# Allegro board QUADCOPTER1brd2_2.brd
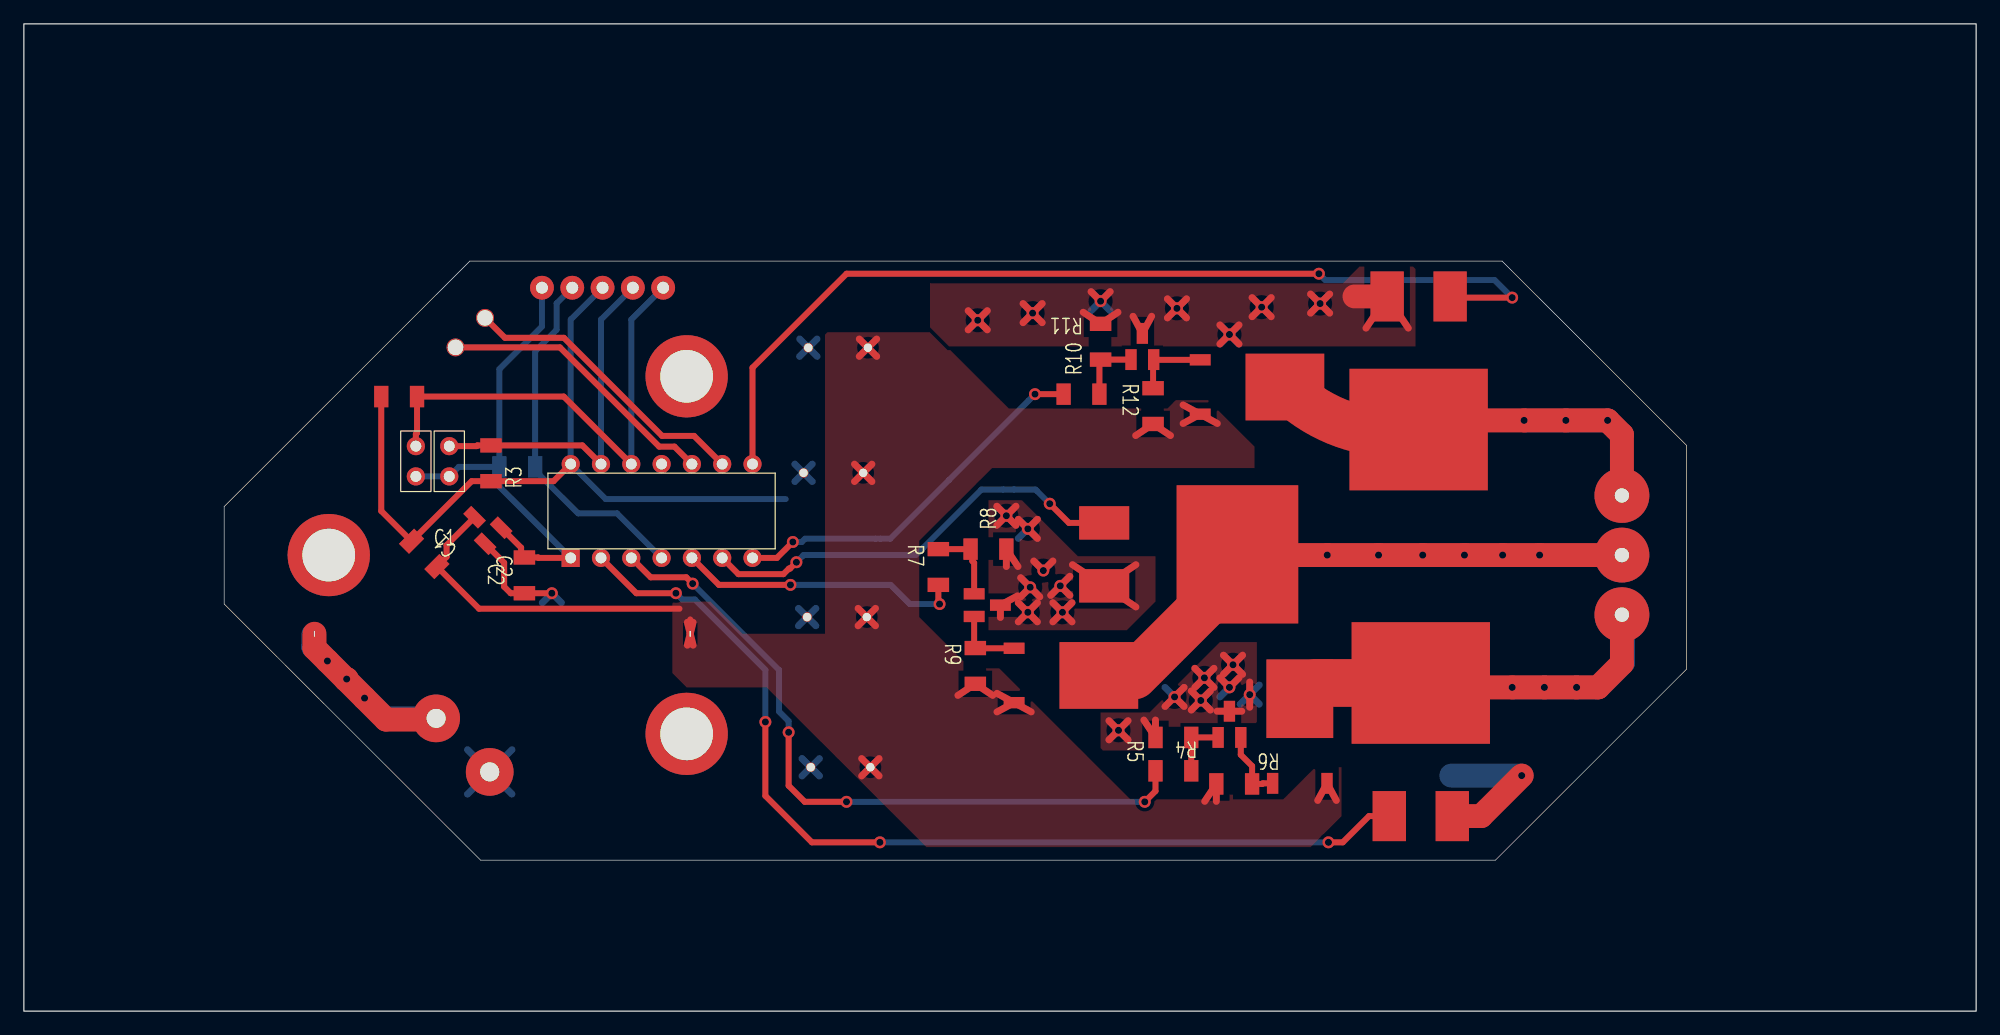
[diagram p0: board, top side]
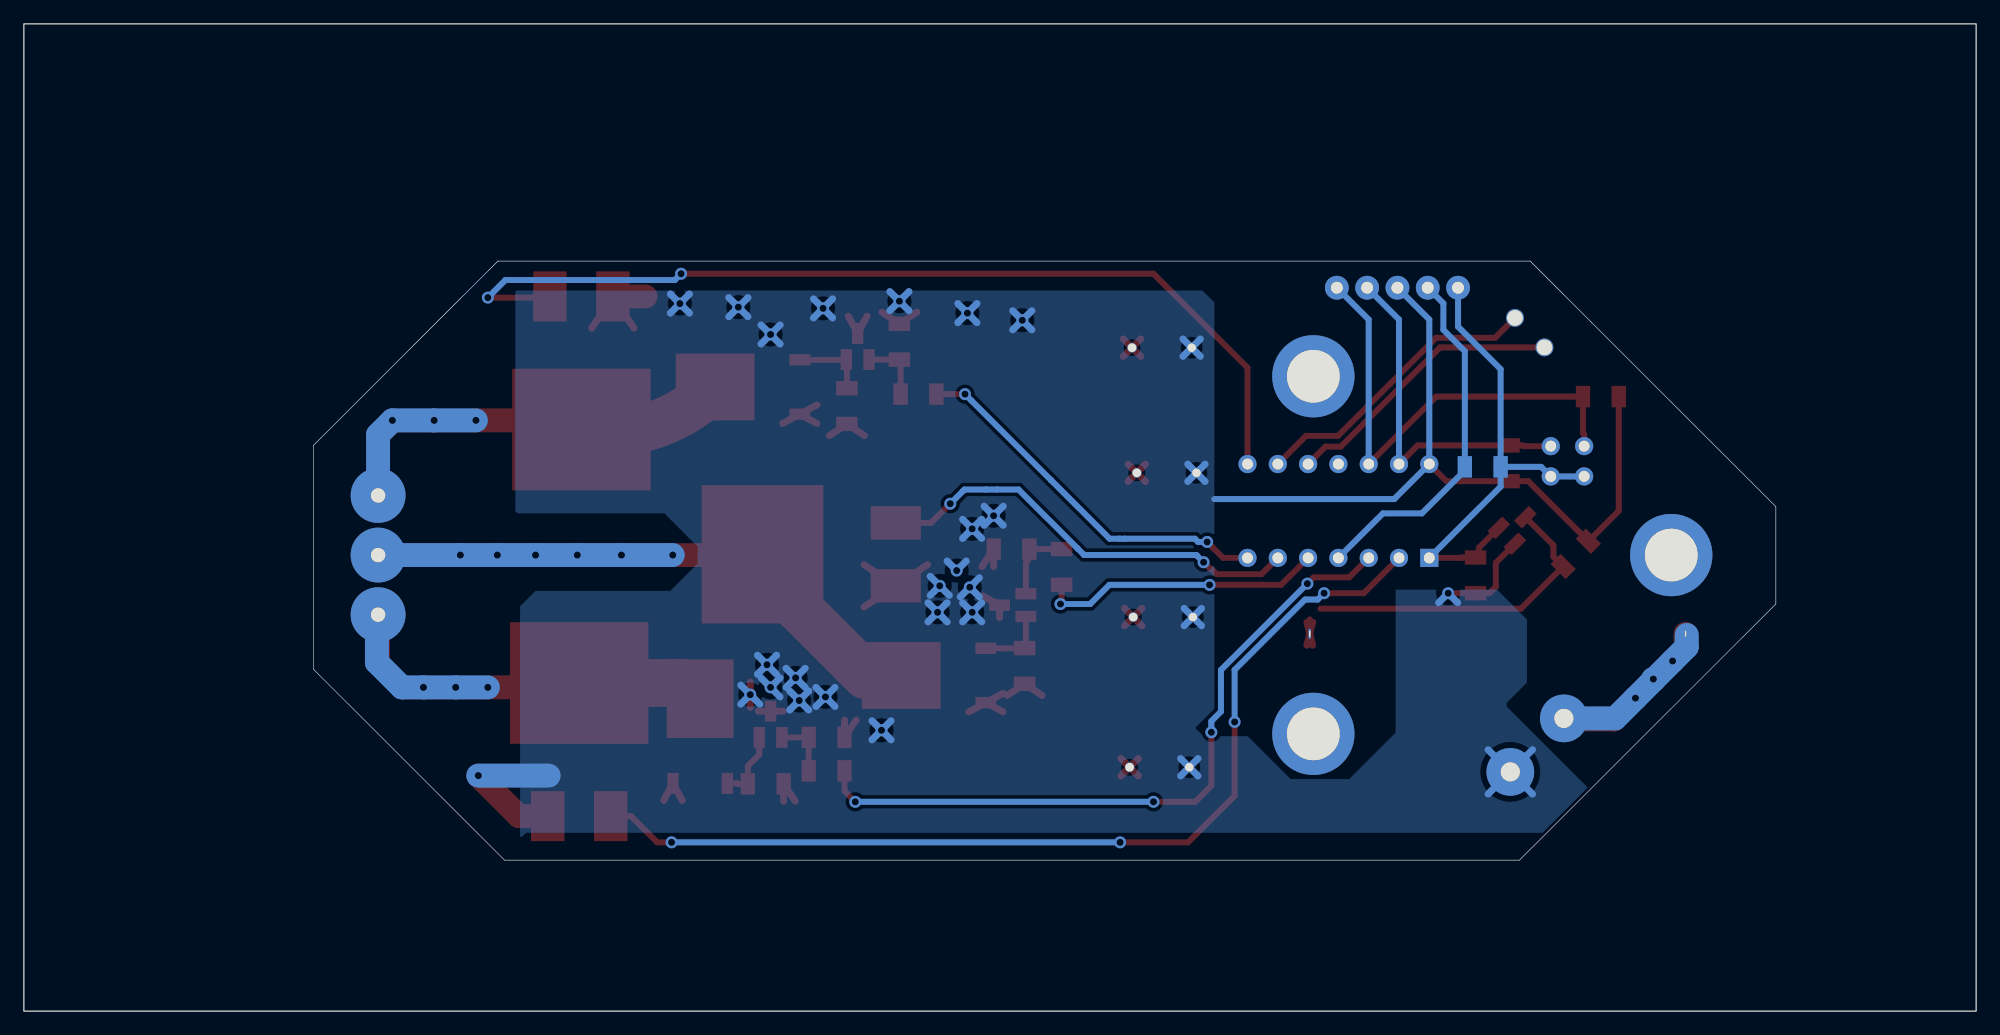
[diagram p1: board, bottom side, seen from below]

Outline 163.65 x 82.83 mm; copper layers: TOP, BOTTOM. Coordinates in mm from the lower left corner of the outline.
Outline path: rectangle 0,0 163.65,82.83 ; 16.79,42.33 16.79,34.16 38.28,12.67 123.36,12.67 139.36,28.68 139.36,47.48 123.92,62.93 37.39,62.93 16.79,42.33

## Placement (name value [footprint] x y rotation side)
C1  1uF  [SMD_CAP_1206]  33.56 38.36 135 top
C2  1uF  [SMD_CAP_1206]  41.96 36.56 270 top
C3  100uF  [CAP250]  73.76 58.66 180 top
C4  100uF  [CAP250]  73.36 48.16 180 top
C5  100uF  [CAP250]  73.66 36.06 180 top
C6  100uF  [CAP250]  73.96 23.46 180 top
F1  FUSE  [FUSECLIP]  4.36 11.66 0 top
FET1  ON NTD5867  [INF-PG-SOT23_L]  101.06 24.06 90 top
FET2  ON NTD5867  [INF-PG-SOT23_L]  80.76 34.06 0 top
FET3  ON NTD5867  [INF-PG-SOT23_L]  93.76 55.76 90 top
FET4  ON NTD20P06L  [INF-PG-TO252-3-1_N]  106.96 23.86 90 top
FET5  ON NTD20P06L  [INF-PG-TO252-3-1_N]  87.76 28.16 0 top
FET6  ON NTD20P06L  [INF-PG-TO252-3-1_N]  103.36 52.36 0 top
FET7  IRF640NS  [D2PAK]  94.46 -3.64 0 top
FET8  IRF640NS  [D2PAK]  70.56 60.96 270 top
FET9  IRF640NS  [D2PAK]  139.56 79.96 180 top
J1  CON2  [KDCONN2]  34.56 24.56 315 top
J2  CON2  [KDCONN2_2]  38.66 58.16 225 top
J3  To Motor  [ED1362]  136.46 30.76 90 top
J4  CON5  [CONN5]  42.16 61.96 270 top
J5  JUMPER  [JUMPER2]  35.66 44.86 90 top
J6  JUMPER  [JUMPER2]  32.86 44.86 90 top
NOREF  -  [unnamed]  55.56 53.26 0 top
NOREF#2  -  [unnamed]  55.56 23.26 0 top
NOREF#3  -  [unnamed]  25.56 38.26 0 top
Q1  Diodes_AP1117T50L-U  [INF-PG-SOT23_L]  38.56 40.66 135 top
R1  10k  [SMD_RES_1206]  41.36 45.66 180 bottom
R2  10k  [SMD_RES_1206]  31.46 51.56 0 top
R3  10k  [SMD_RES_1206]  39.16 45.96 90 top
R4  10k  [SMD_RES_1206]  96.36 20.16 180 top
R5  10k  [SMD_RES_1206]  96.36 22.96 0 top
R6  10k  [SMD_RES_1206]  101.46 19.06 180 top
R7  10k  [SMD_RES_1206]  76.66 37.26 270 top
R8  10k  [SMD_RES_1206]  80.86 38.76 180 top
R9  10k  [SMD_RES_1206]  79.76 28.96 270 top
R10  10k  [SMD_RES_1206]  88.66 51.76 180 top
R11  10k  [SMD_RES_1206]  90.26 56.16 270 top
R12  10k  [SMD_RES_1206]  94.66 50.76 270 top
U1  PIC16F1503  [PIC16FL1503]  53.46 41.96 90 top

## Library data of the parts
C1-C6 = CAP
F1 = FUSE
FET1-FET3 = ON NTD5867
FET4-FET6 = ON NTD20P06L_0
FET7-FET9 = IRF640NS_0
J1 J2 = CON2
J3 = CON3
J4 = CON5
J5 J6 = JUMPER: User Part Number: ***
Q1 = Diodes_AP1117T50L-U_1
R1-R12 = R
U1 = PIC16LF1503_4

## Footprints (pads in the part's own frame, mm; a bottom-side part is the same pattern mirrored in y, then rotated)
CAP250
  round 0.8 hole 0.7: 1(3,3) 2(8,3)
CONN5
  round 2 hole 1: 1(1.27,11.43) 2(1.27,8.89) 3(1.27,6.35) 4(1.27,3.81) 5(1.27,1.27)
D2PAK
  rect 2.8x4.2 smd: 1(20,20) 3(25.28,20)
  rect 11.6x10.2 smd: 2(22.64,31.17)
ED1362
  round 4.6 hole 1.2: 1(2.5,2.5) 2(7.5,2.5) 3(12.5,2.5)
FUSECLIP
  rect 0.2x0.8 hole 0.1x0.5: 1(20,20) 2(51.5,20)
INF-PG-SOT23_L
  rect 1.75x0.95 smd: 1(-1.1,0.95) 2(-1.1,-0.95) 3(1.1,0)
INF-PG-TO252-3-1_N
  rect 1.75x0.95 smd: 1(-4.75,2.28) 3(-4.75,-2.28)
  rect 6.6x5.6 smd: 2(2.35,0)
JUMPER2
  round 1.524 hole 0.914: 1(0,0) 2(2.54,0)
KDCONN2
  round 4 hole 1.6: 1(0,0) 2(6.35,0)
KDCONN2_2
  round 1.5 hole 1.3: 1(0,0) 2(3.5,0)
PIC16FL1503
  rect 1.524x1.524 hole 0.914: 1(-3.937,7.62)
  round 1.524 hole 0.914: 2(-3.937,5.08) 3(-3.937,2.54) 4(-3.937,0) 5(-3.937,-2.54) 6(-3.937,-5.08) 7(-3.937,-7.62) 8(3.937,-7.62) 9(3.937,-5.08) 10(3.937,-2.54) 11(3.937,0) 12(3.937,2.54) 13(3.937,5.08) 14(3.937,7.62)
SMD_CAP_1206
  rect 1.2x1.8 smd: 1(-1.5,0) 2(1.5,0)
SMD_RES_1206
  rect 1.2x1.8 smd: 1(-1.5,0) 2(1.5,0)
unnamed
  round 6.9 hole 4.42: (0,0)

## Nets
12V: C1.1 C3.1 C4.1 C5.1 C6.1 F1.2 FET4.3(S) FET5.3(S) FET6.3(S) Q1.3(VIN) R6.2 R9.2 R12.2
GND: C1.2 C2.2 C3.2 C4.2 C5.2 C6.2 FET1.3(S) FET2.3(S) FET3.3(S) FET7.3(S) FET8.3(S) FET9.3(S) J1.2 J4.3 Q1.1(GND) R2.1 R3.1 R5.1 R8.1 R11.1 U1.14(VSS)
A: FET4.2(D) FET7.2(D) J3.1
ADDR0: J4.2 J5.2 R3.2 U1.13(ICSPDAT/ADDR0)
ADDR1: J4.1 J6.2 R2.2 U1.12(ICSPCLK/ADDR1)
AHIGH: R4.2 U1.3(RA4)
ALOW: FET7.1(G) U1.2(RA5)
B: FET5.2(D) FET8.2(D) J3.2
BHIGH: R7.2 U1.5(RC5)
BLOW: FET8.1(G) U1.6(RC4)
C: FET6.2(D) FET9.2(D) J3.3
CHIGH: R10.2 U1.7(RC3)
CLOW: FET9.1(G) U1.8(RC2)
NMCLR: J4.4 R1.1 U1.4(NMCLR)
SCL: J2.2 U1.10(SCL)
SDA: J2.1 U1.9(SDA)
VEXT: C2.1 J4.5 J5.1 J6.1 Q1.2(VOUT) R1.2 U1.1(VDD)
N76044: F1.1 J1.1
N143086: FET1.1(G) R4.1 R5.2
N143844: FET2.1(G) R7.1 R8.2
N143928: FET2.2(D) FET5.1(G) R9.1
N144222: FET3.2(D) FET6.1(G) R12.1
N144242: FET3.1(G) R10.1 R11.2
N158488: FET1.2(D) FET4.1(G) R6.1

Pads without a net: U1 11

## Via types
v1: diameter 1, hole 0.6, TOP to BOTTOM, 54 vias

## Routing (per net, layer and track width the routed paths; a pad name or vN(x,y) marks a point on that pad's centre or on a via; arc(x,y) is an arc through that point)
12V: length 72.2
  TOP w0.5: 54.96,33.76 38.16,33.76 C1.1 35.43,38.12 35.43,39.09 Q1.3 ; F1.2 55.86,32.86
  TOP w0.581: 110.02,17.68 FET4.3 108.46,17.68 ; FET6.3 100.04,49.31 ; FET6.3 97.18,49.31 ; FET6.3 97.18,50.86 ; C4.1 71.09,44.44 ; C4.1 69.63,44.44 ; C4.1 69.63,45.89 ; C4.1 71.09,45.89 ; C5.1 71.39,32.34 ; C5.1 69.93,32.34 ; C5.1 71.39,33.79 ; C5.1 69.93,33.79 ; 98.99,17.6 R6.2 99.96,17.6 ; 81.22,26.49 R9.2 78.3,26.49 ; 55.62,32.62 F1.2 ; F1.2 55.62,30.7 ; F1.2 56.1,30.7 ; F1.2 56.1,32.62 ; 81.58,25.11 FET5.3 ; FET5.3 84.44,25.11 ; FET5.3 81.58,26.66 ; 70.03,56.39 C3.1 ; C3.1 70.03,54.94 ; C3.1 71.49,56.39 ; C3.1 71.49,54.94 ; C6.1 71.69,19.74 ; C6.1 71.69,21.19 ; C6.1 70.23,21.19 ; C6.1 70.23,19.74 ; 96.12,48.29 R12.2 93.2,48.29
GND: length 321.4
  TOP w0.5: Q1.1 40.26,37.62 40.26,35.61 40.81,35.06 C2.2 v1(44.26,35.06) ; U1.14 44.4,44.46 R3.1 37.54,44.46 C1.2 29.96,41.96 R2.1
  TOP w0.581: 84.66,37.76 v1(85.46,36.96) 86.26,37.76 ; v1(82.36,41.56) 83.16,40.76 ; v1(82.36,41.56) 81.56,42.36 ; v1(82.36,41.56) 81.56,40.76 ; v1(82.36,41.56) 83.16,42.36 ; v1(84.56,58.56) 85.36,57.76 ; v1(84.56,58.56) 83.76,59.36 ; v1(84.56,58.56) 83.76,57.76 ; v1(84.56,58.56) 85.36,59.36 ; v1(91.76,23.56) 92.56,22.76 ; v1(91.76,23.56) 90.96,22.76 ; v1(91.76,23.56) 92.56,24.36 ; v1(91.76,23.56) 90.96,24.36 ; 83.36,34.26 v1(84.16,33.46) ; v1(84.16,33.46) 83.36,32.66 ; v1(84.16,33.46) 84.96,32.66 ; v1(84.16,33.46) 84.96,34.26 ; v1(98.96,27.96) 99.76,28.76 ; v1(98.96,27.96) 98.16,27.16 ; v1(98.96,27.96) 99.76,27.16 ; v1(98.96,27.96) 98.16,28.76 ; 102.76,27.62 v1(102.76,26.56) 102.76,25.5 ; 82.36,37.3 R8.1 83.33,37.3 ; v1(79.96,57.96) 80.76,57.16 ; v1(79.96,57.96) 79.16,57.16 ; v1(79.96,57.96) 79.16,58.76 ; v1(79.96,57.96) 80.76,58.76 ; v1(98.66,26.06) 99.46,25.26 ; v1(98.66,26.06) 97.86,26.86 ; v1(98.66,26.06) 99.46,26.86 ; v1(98.66,26.06) 97.86,25.26 ; 102.96,59.86 v1(103.76,59.06) ; v1(103.76,59.06) 102.96,58.26 ; v1(103.76,59.06) 104.56,58.26 ; v1(103.76,59.06) 104.56,59.86 ; 92.98,58.3 FET3.3 94.54,58.3 ; v1(101.36,29.06) 102.16,28.26 ; v1(101.36,29.06) 100.56,28.26 ; v1(101.36,29.06) 100.56,29.86 ; v1(101.36,29.06) 102.16,29.86 ; 100.26,55.97 v1(101.06,56.77) ; v1(101.06,56.77) 101.86,57.57 ; v1(101.06,56.77) 101.86,55.97 ; v1(101.06,56.77) 100.26,57.57 ; v1(108.66,59.36) 109.46,60.16 ; v1(108.66,59.36) 109.46,58.56 ; v1(108.66,59.36) 107.86,60.16 ; v1(108.66,59.36) 107.86,58.56 ; FET8.3 93.22,33.91 ; FET8.3 87.9,37.46 ; FET8.3 93.22,37.46 ; 94.86,24.42 R5.1 93.89,24.42 ; v1(96.46,26.36) 97.26,25.56 ; v1(96.46,26.36) 95.66,25.56 ; v1(96.46,26.36) 97.26,27.16 ; 89.46,60.36 v1(90.26,59.56) 91.06,60.36 ; 83.56,34.76 v1(84.36,35.56) ; v1(84.36,35.56) 83.56,36.36 ; v1(84.36,35.56) 85.16,34.76 ; v1(84.16,40.46) 84.96,39.66 ; v1(84.16,40.46) 83.36,41.26 ; v1(84.16,40.46) 84.96,41.26 ; 86.26,32.66 v1(87.06,33.46) ; v1(87.06,33.46) 86.26,34.26 ; v1(87.06,33.46) 87.86,32.66 ; v1(87.06,33.46) 87.86,34.26 ; v1(96.66,58.96) 97.46,58.16 ; v1(96.66,58.96) 95.86,58.16 ; v1(96.66,58.96) 95.86,59.76 ; v1(96.66,58.96) 97.46,59.76 ; 100.26,27.96 v1(101.06,27.16) 101.86,27.96 ; 83.29,34.84 FET2.3 81.86,33.03 ; 88.8,58.64 R11.1 91.72,58.64 ; v1(86.88,35.68) 87.68,34.88 ; v1(86.88,35.68) 87.68,36.48 ; v1(86.88,35.68) 86.08,34.88 ; 112.51,57.3 FET9.3 116.05,57.3 ; 100.03,25.16 FET1.3 102.09,25.16
  TOP w2: v1(125.56,19.76) 122.16,16.36 FET7.3 ; FET9.3 111.54,59.96
  BOTTOM w0.5: 63.86,42.96 48.78,42.96 U1.14 45.84,58.02 J4.3
  BOTTOM w0.581: 89.46,58.76 v1(90.26,59.56) ; v1(90.26,59.56) 89.46,60.36 ; v1(90.26,59.56) 91.06,60.36 ; v1(90.26,59.56) 91.06,58.76 ; v1(84.16,40.46) 84.96,39.66 ; v1(84.16,40.46) 83.36,39.66 ; v1(84.16,40.46) 84.96,41.26 ; v1(84.16,40.46) 83.36,41.26 ; 97.86,26.86 v1(98.66,26.06) ; v1(98.66,26.06) 97.86,25.26 ; v1(98.66,26.06) 99.46,26.86 ; v1(98.66,26.06) 99.46,25.26 ; v1(103.76,59.06) 104.56,58.26 ; v1(103.76,59.06) 102.96,58.26 ; v1(103.76,59.06) 102.96,59.86 ; v1(103.76,59.06) 104.56,59.86 ; 100.26,27.96 v1(101.06,27.16) ; v1(101.06,27.16) 101.86,27.96 ; v1(101.06,27.16) 100.26,26.36 ; C3.2 66.49,54.94 ; C3.2 65.03,56.39 ; C3.2 66.49,56.39 ; C3.2 65.03,54.94 ; 86.26,32.66 v1(87.06,33.46) ; v1(87.06,33.46) 86.26,34.26 ; v1(87.06,33.46) 87.86,34.26 ; v1(87.06,33.46) 87.86,32.66 ; 79.16,57.16 v1(79.96,57.96) ; v1(79.96,57.96) 80.76,58.76 ; v1(79.96,57.96) 80.76,57.16 ; v1(79.96,57.96) 79.16,58.76 ; 83.36,34.26 v1(84.16,33.46) ; v1(84.16,33.46) 84.96,32.66 ; v1(84.16,33.46) 83.36,32.66 ; v1(84.16,33.46) 84.96,34.26 ; 86.26,37.76 v1(85.46,36.96) 84.66,37.76 ; v1(96.46,26.36) 97.26,25.56 ; v1(96.46,26.36) 95.66,27.16 ; v1(96.46,26.36) 97.26,27.16 ; v1(96.46,26.36) 95.66,25.56 ; C5.2 66.39,33.79 ; C5.2 64.93,33.79 ; C5.2 64.93,32.34 ; C5.2 66.39,32.34 ; 98.16,27.16 v1(98.96,27.96) ; v1(98.96,27.96) 99.76,27.16 ; v1(98.96,27.96) 99.76,28.76 ; v1(98.96,27.96) 98.16,28.76 ; v1(102.76,26.56) 103.56,25.76 ; v1(102.76,26.56) 101.96,25.76 ; v1(102.76,26.56) 103.56,27.36 ; 65.23,21.19 C6.2 ; C6.2 66.69,21.19 ; C6.2 65.23,19.74 ; C6.2 66.69,19.74 ; 95.86,58.16 v1(96.66,58.96) ; v1(96.66,58.96) 97.46,59.76 ; v1(96.66,58.96) 95.86,59.76 ; v1(96.66,58.96) 97.46,58.16 ; 83.56,34.76 v1(84.36,35.56) ; v1(84.36,35.56) 83.56,36.36 ; v1(84.36,35.56) 85.16,34.76 ; 100.56,29.86 v1(101.36,29.06) ; v1(101.36,29.06) 100.56,28.26 ; v1(101.36,29.06) 102.16,29.86 ; v1(101.36,29.06) 102.16,28.26 ; J1.2 40.91,21.93 ; J1.2 40.91,18.21 ; J1.2 37.19,21.93 ; J1.2 37.19,18.21 ; 83.76,59.36 v1(84.56,58.56) ; v1(84.56,58.56) 83.76,57.76 ; v1(84.56,58.56) 85.36,57.76 ; v1(84.56,58.56) 85.36,59.36 ; v1(101.06,56.77) 101.86,55.97 ; v1(101.06,56.77) 100.26,57.57 ; v1(101.06,56.77) 100.26,55.97 ; v1(101.06,56.77) 101.86,57.57 ; C4.2 66.09,44.44 ; C4.2 64.63,44.44 ; C4.2 64.63,45.89 ; C4.2 66.09,45.89 ; 90.96,22.76 v1(91.76,23.56) ; v1(91.76,23.56) 92.56,24.36 ; v1(91.76,23.56) 92.56,22.76 ; v1(91.76,23.56) 90.96,24.36 ; 107.86,60.16 v1(108.66,59.36) ; v1(108.66,59.36) 109.46,60.16 ; v1(108.66,59.36) 107.86,58.56 ; v1(108.66,59.36) 109.46,58.56 ; v1(86.88,35.68) 87.68,34.88 ; v1(86.88,35.68) 87.68,36.48 ; v1(86.88,35.68) 86.08,34.88 ; v1(82.36,41.56) 83.16,40.76 ; v1(82.36,41.56) 83.16,42.36 ; v1(82.36,41.56) 81.56,40.76 ; v1(82.36,41.56) 81.56,42.36 ; 45.06,34.26 v1(44.26,35.06) 43.46,34.26
  BOTTOM w2: v1(125.56,19.76) 119.66,19.76
A: length 46.9
  TOP w2: 108.28,27.53 FET4.2 ; 134.06,33.36 J3.1 133.96,29.16 131.96,27.16 v1(130.16,27.16) v1(127.46,27.16) v1(124.76,27.16) 117.47,27.16 FET7.2
  TOP w4: FET7.2 108.28,27.53
  BOTTOM w2: v1(124.76,27.16) v1(127.46,27.16) v1(130.16,27.16) 131.96,27.16 134.06,29.26 134.06,33.26
ADDR0: length 29.3
  TOP w0.5: U1.13 46.82,47.46 R3.2 38.01,47.46 37.95,47.4 J5.2
  BOTTOM w0.5: U1.13 48.38,58.02 J4.2
ADDR1: length 40.4
  TOP w0.5: J6.2 32.86,48.42 32.96,48.52 R2.2 45.26,51.56 U1.12
  BOTTOM w0.5: J4.1 50.92,58.02 U1.12
AHIGH: length 59.7
  TOP w0.5: v1(68.96,17.56) 65.46,17.56 64.11,18.91 v1(64.11,23.4) ; v1(93.96,17.56) 94.86,18.46 R4.2 ; v1(56.06,35.87) 55.53,36.4 52.55,36.4 U1.3
  BOTTOM w0.5: v1(64.11,23.4) 64.11,24.33 63.31,25.13 63.31,27.22 63.31,27.22 63.31,28.62 v1(56.06,35.87) ; v1(93.96,17.56) v1(68.96,17.56)
ALOW: length 83.1
  TOP w0.5: v1(54.66,35.06) 51.34,35.06 U1.2 ; v1(71.76,14.16) 66.06,14.16 62.16,18.06 v1(62.16,24.26) ; v1(109.36,14.16) 110.56,14.16 112.76,16.36 FET7.1
  BOTTOM w0.5: v1(71.76,14.16) v1(109.36,14.16) ; v1(54.66,35.06) 55.19,34.53 56.26,34.53 62.16,28.63 v1(62.16,24.26)
B: length 73.7
  TOP w2: 101.73,36.83 FET8.2 101.79,38.26 v1(109.26,38.26) v1(113.56,38.26) v1(117.26,38.26) v1(120.76,38.26) v1(123.96,38.26) v1(127.06,38.26) J3.2 ; FET5.2 93.06,28.16
  TOP w4: 93.06,28.16 101.73,36.83
  BOTTOM w2: J3.2 v1(127.06,38.26) v1(123.96,38.26) v1(120.76,38.26) v1(117.26,38.26) v1(113.56,38.26) v1(109.26,38.26)
BHIGH: length 24
  TOP w0.5: R7.2 76.66,34.26 76.76,34.16 v1(76.76,34.16) ; v1(64.26,35.76) 58.26,35.76 U1.5
  BOTTOM w0.5: v1(64.26,35.76) 72.66,35.76 74.27,34.16 v1(76.76,34.16)
BLOW: length 36.7
  TOP w0.5: v1(64.76,37.66) 64.23,37.13 64.14,37.13 63.67,36.66 59.9,36.66 U1.6 ; v1(86,42.57) 87.61,40.96 FET8.1
  BOTTOM w0.5: v1(64.76,37.66) 65.29,38.19 65.29,38.19 65.37,38.27 68.27,38.27 68.27,38.27 68.57,38.27 71.17,38.27 71.57,38.27 72.41,38.27 72.41,38.27 74.78,38.27 75.34,38.83 80.27,43.76 82.1,43.76 83,43.76 84.81,43.76 84.94,43.63 v1(86,42.57)
C: length 49.1
  TOP w2: 116.99,48.86 117.69,49.56 v1(125.76,49.56) v1(129.26,49.56) v1(132.76,49.56) 133.96,48.36 J3.3 ; 116.59,48.46 FET9.2
  TOP w4: 116.59,48.46 115.13,48.46 arc(110.03,49.48) FET6.2 ; 116.99,48.86 FET9.2
  BOTTOM w2: J3.3 133.96,48.36 v1(132.76,49.56) v1(129.26,49.56) v1(125.76,49.56)
CHIGH: length 31.8
  TOP w0.5: R10.2 v1(84.76,51.76) ; U1.7 63.12,38.03 v1(64.46,39.36)
  BOTTOM w0.5: v1(64.46,39.36) 65.21,39.36 65.48,39.64 71.39,39.64 71.79,39.64 72.63,39.64 77.56,44.57 84.23,51.23 v1(84.76,51.76)
CLOW: length 81.1
  TOP w0.5: v1(108.56,61.87) 68.96,61.87 61.08,53.98 U1.8 ; v1(124.76,59.86) 119.66,59.86 FET9.1
  BOTTOM w0.5: v1(108.56,61.87) 109.09,61.34 123.29,61.34 v1(124.76,59.86)
NMCLR: length 30.3
  BOTTOM w0.5: J4.4 44.66,59.38 44.66,57.16 42.86,55.36 R1.1 42.86,45.36 46.46,41.76 49.72,41.76 U1.4
SCL: length 23.9
  TOP w0.5: J2.2 44.93,55.69 53.26,47.36 54.54,47.36 U1.10
SDA: length 25
  TOP w0.5: J2.1 40.33,56.49 45.27,56.49 53.5,48.26 56.18,48.26 U1.9
VEXT: length 41.4
  TOP w0.5: Q1.2 41.68,38.88 41.68,38.34 arc(41.7,38.33) 41.71,38.31 C2.1 43.11,38.06 43.15,38.03 U1.1
  BOTTOM w0.5: J4.5 43.43,57.43 39.86,53.86 R1.2 ; J5.1 36.46,45.66 R1.2 ; J5.1 J6.1 ; J5.1 35.86,44.86 ; R1.2 39.86,44.01 U1.1
N76044: length 27.8
  TOP w2: 34.56,24.46 30.36,24.46 v1(28.56,26.26) 27.06,27.76 v1(27.06,27.86) 26.96,27.86 v1(25.45,29.38) 24.36,30.46 F1.1
  BOTTOM w2: 24.26,31.56 24.26,30.56 v1(25.45,29.38) 26.96,27.86 v1(27.06,27.86) 27.06,27.76 v1(28.56,26.26) 30.26,24.56 J1.1
N143086: length 5.3
  TOP w0.5: 97.86,20.06 R4.1 R5.2 FET1.1 100.26,22.96
N143844: length 6.6
  TOP w0.5: R7.1 R8.2 79.51,38.61 79.51,37.76 79.66,37.61 FET2.1
N143928: length 5.9
  TOP w0.5: FET2.2 79.66,30.56 R9.1 79.78,30.44 FET5.1
N144222: length 6.3
  TOP w0.5: 94.69,54.64 FET3.2 ; 94.69,54.64 94.66,54.61 R12.1 ; 94.69,54.64 FET6.1
N144242: length 5.5
  TOP w0.5: FET3.1 R11.2 90.16,54.56 R10.1
N158488: length 6
  TOP w0.5: FET4.1 103.86,19.11 103.81,19.06 R6.1 102.96,20.56 102.01,21.51 FET1.2

## Copper pours and planes (outline as drawn; the poured copper is in the pictures)
12V on TOP: 75.66,13.76 107.86,13.76 110.46,16.36 110.46,20.46 108.26,20.46 105.56,17.76 101.36,17.76 101.36,20.36 101.46,20.46 99.06,20.46 99.06,17.86 99.16,17.76 92.76,17.76 81.76,28.76 79.36,28.76 75.06,33.06 75.06,39.46 81.16,45.56 103.16,45.56 103.16,47.36 99.26,51.26 96.56,51.26 95.86,50.56 82.56,50.56 76.16,56.96 67.36,56.96 67.16,56.76 67.16,31.66 60.26,31.66 57.56,34.36 54.36,34.36 54.36,28.36 55.56,27.16 62.26,27.16
GND on TOP: 80.86,31.96 80.86,42.86 83.66,42.86 88.36,38.16 94.86,38.16 94.86,34.36 92.46,31.96
GND on TOP: 90.46,21.86 96.36,21.86 96.56,21.66 96.96,22.06 96.96,24.16 103.26,24.16 103.36,24.26 103.36,30.96 100.26,30.96 94.36,25.06 90.26,25.06 90.26,22.06
GND on TOP: 116.66,55.76 116.66,62.26 116.46,62.46 111.96,62.46 110.56,61.06 76.06,61.06 75.96,61.16 75.96,57.36 77.56,55.76
GND on BOTTOM: 122.06,14.46 122.06,33.96 120.76,35.26 109.46,35.26 107.16,37.56 107.16,38.96 109.96,41.76 122.26,41.76 122.46,41.96 122.46,60.36 122.36,60.46 64.86,60.46 63.86,59.46 63.86,25.36 65.46,23.76 64.76,23.06 61.06,23.06 57.46,19.46 52.56,19.46 48.66,23.36 48.66,35.36 40.16,35.36 37.66,32.86 37.66,27.56 39.36,25.86 39.36,25.56 32.56,18.76 36.36,14.96 121.56,14.96
